# Altium PCB MAGI'sCore.PcbDoc (part 2 of 2)
Units mil, origin at the board's own origin, x right, y up, seen from the top; angles counter-clockwise.
Board outline 6000 x 4000 mil, 2 copper layers (Top Layer, Bottom Layer); 22 components, 33 nets, 128 pads, 28 vias.
Unrouted connection lines stored in the file: 1.
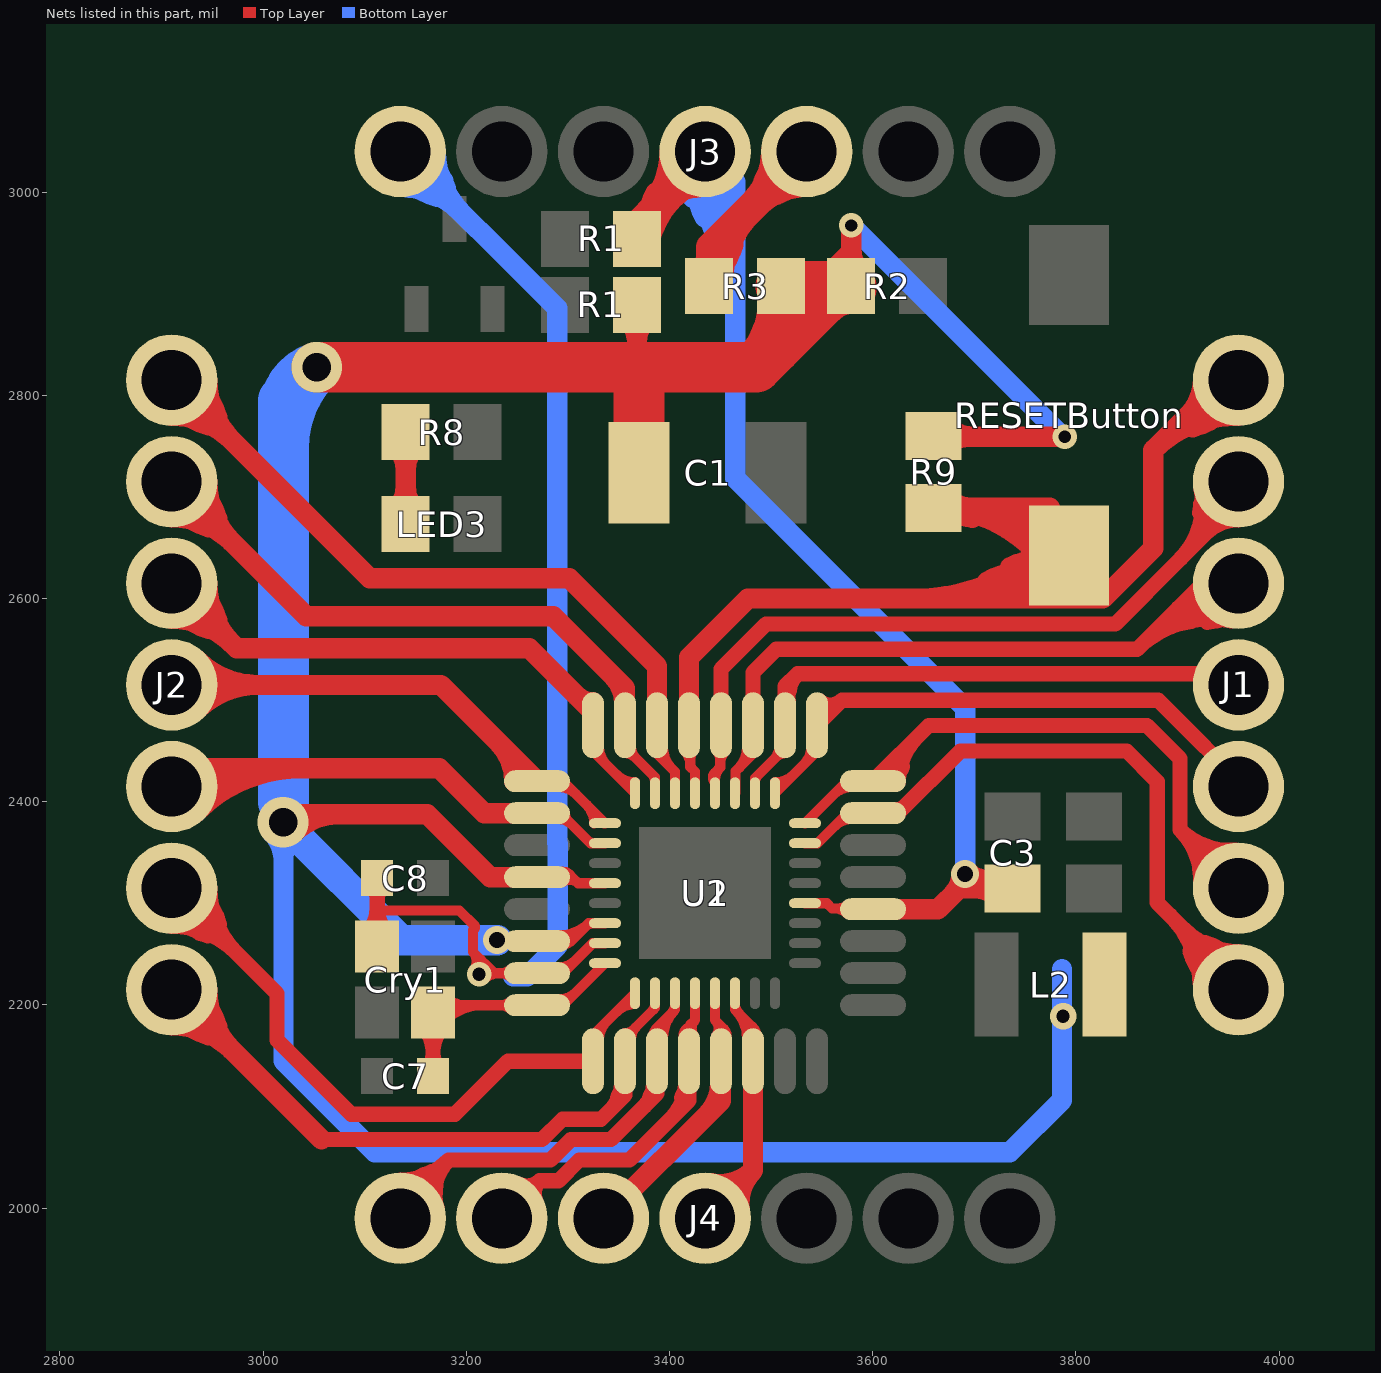
[diagram p2: the nets of this part, all layers, seen from the top]

## Via types
v1: diameter 25.98, hole 12.99, Top Layer to Bottom Layer, tented top, 7 vias
v2: diameter 24, hole 12, Top Layer to Bottom Layer, 6 vias
v3: diameter 27.56, hole 15.75, Top Layer to Bottom Layer, 6 vias
v4: diameter 25.98, hole 12.99, Top Layer to Bottom Layer, 5 vias
v5: diameter 50, hole 28, Top Layer to Bottom Layer, 3 vias
v6: diameter 24, hole 12.99, Top Layer to Bottom Layer, 1 vias

## Nets (pads, with @x,y where several pads share a name; then routed paths per layer and width w, separated by ;. In a path a pad name is that pad's centre, name@x,y a point inside that pad or via, vN(x,y) a via of type N, cw(c..) or ccw(c..) an arc to the next point about the centre after c; other vN are vias at no path point) (continued)
NetC3_2: C3.2 J3.4 R1.2@3368.11,2953.94 U1.20 U2.20 | length 2765.2
  Top Layer w10: U2.20@3533.43,2300.16 3554.84,2300.16 3560,2295 U1.20@3599.61,2295 ; 3562.83,2295 cw(c3562.83,2278.38) 3574.58,2290.13 ccw(c3562.83,2278.38) 3562.83,2295 ; 3566.44,2295 ccw(c3566.44,2306.51) 3574.58,2298.37 cw(c3566.44,2306.51) 3566.44,2295
  Top Layer w20: R1.2@3361.94,2959.47 cw(c3398.67,2949.95) 3379.7,2982.82 ; R1.2@3368.11,2953.94 3368.11,2973.11 J3.4@3435,3040 ; R1.2@3381.27,2961.4 cw(c3429.54,2974.33) 3386.26,2999.32 ; R1.2@3381.3,2954.46 cw(c3463.48,2933.16) J3.4@3421.03,3006.68 ; R1.2@3381.73,2957.87 cw(c3451.4,2957.87) 3402.14,3007.14 ; J3.4@3400,3040 cw(c3315.5,3040) 3375.25,2980.25 cw(c3435,2920.5) J3.4@3435,3005 ; U1.20@3600.35,2294.25 3664.25,2294.25 3684.57,2314.57 ; 3682.78,2312.36 cw(c3703.63,2306.77) v3@3692.83,2325.47 ; v3@3691.92,2325.09 cw(c3697.51,2304.24) 3708.31,2322.93 ; C3.2@3721.3,2308.85 ccw(c3698.86,2298.46) 3705.26,2322.34 ccw(c3711.81,2346.8) C3.2@3726.02,2325.84 ; C3.2@3727.28,2304.25 C3.2@3737.6,2314.57 3684.57,2314.57 ; 3684.57,2314.57 ccw(c3675.92,2323.21) 3687.4,2327.44 cw(c3675.92,2323.21) 3684.57,2314.57 ; 3700.78,2314.57 cw(c3700.78,2281.68) 3724.03,2304.93 ccw(c3700.78,2281.68) 3700.78,2314.57 ; 3700.78,2314.57 ccw(c3700.78,2347.45) 3724.03,2324.2 cw(c3700.78,2347.45) 3700.78,2314.57 ; 3678.98,2308.98 ccw(c3659.22,2328.74) 3687.17,2328.74 cw(c3659.22,2328.74) 3678.98,2308.98 ; v3@3693.62,2331.41 ccw(c3734.29,2372.08) 3734.29,2314.57 cw(c3734.29,2372.08) v3@3693.62,2331.41
  Bottom Layer w20: 3423.01,2994.41 cw(c3455.29,3014.17) J3.4@3431.91,3043.93 ; J3.4@3425.94,3006.19 cw(c3416.88,2972.36) 3447.21,2989.87 ; 3434.74,2975.24 cw(c3469.26,2996.37) J3.4@3444.26,3028.2 ; J3.4@3435,3040 3464.57,3010.43 3464.57,2718.5 3690.94,2492.13 v3(3690.94,2328.74) ; 3446.48,2956.07 cw(c3483.24,2978.57) J3.4@3456.62,3012.47 ; 3455.71,2975.15 cw(c3485.54,2992.37) J3.4@3460.47,3016 ; J3.4@3410.25,3015.25 cw(c3279.12,2884.12) 3464.57,2884.12 ccw(c3279.12,2884.12) J3.4@3410.25,3015.25 ; J3.4@3424.39,3029.39 cw(c3327.41,2932.41) 3464.57,2932.41 ccw(c3327.41,2932.41) J3.4@3424.39,3029.39 ; J3.4@3438.54,3043.54 cw(c3375.69,2980.69) 3464.57,2980.69 ccw(c3375.69,2980.69) J3.4@3438.54,3043.54
NetJ1_1: J1.1 U1.23 U2.23 | length 1249.2
  Top Layer w10: U2.23@3533.43,2359.21 3545.67,2359.21 3575.2,2388.74 U1.23@3600.35,2388.74 ; 3562.77,2376.31 cw(c3578.7,2360.38) 3578.7,2382.91 ccw(c3578.7,2360.38) 3562.77,2376.31
  Top Layer w15: U1.23@3600.35,2388.74 3624.96,2388.74 3686.22,2450 3850,2450 3880,2420 3880,2300.95 3975,2205.95 J1.1@3975,2190 ; 3912.23,2253.32 ccw(c3974.34,2269.96) J1.1@3958.11,2207.74 ; 3927.27,2261.27 cw(c3913.06,2208.21) J1.1@3967.42,2216.07 ; U1.23@3622.01,2392.07 ccw(c3622.01,2407.22) 3632.73,2396.51 cw(c3622.01,2407.22) U1.23@3622.01,2392.07 ; 3891.78,2289.17 cw(c3817.61,2215) 3922.5,2215 ccw(c3817.61,2215) 3891.78,2289.17 ; 3906.13,2274.81 ccw(c3960,2328.68) 3960,2252.5 cw(c3960,2328.68) 3906.13,2274.81 ; 3917.39,2263.56 cw(c3868.82,2215) 3937.5,2215 ccw(c3868.82,2215) 3917.39,2263.56
NetJ1_2: J1.2 U1.24 U2.24 | length 1162.1
  Top Layer w10: U2.24@3533.43,2378.9 3574.76,2420.24 U1.24@3600.35,2420.24 ; 3562.03,2407.5 cw(c3578.7,2390.83) 3578.7,2414.41 ccw(c3578.7,2390.83) 3562.03,2407.5
  Top Layer w15: U1.24@3600.35,2420.24 3655.12,2475 3870,2475 3902.5,2442.5 3902.5,2372.5 ; U1.24@3620.34,2423.12 ccw(c3610.84,2439.57) 3629.2,2434.65 ; J1.2@3960,2315 3902.5,2372.5 ; J1.2@3975,2290 J1.2@3975,2310 ; 3902.5,2372.5 cw(c3853.42,2323.42) 3922.62,2317.95 ccw(c3853.42,2323.42) 3902.5,2372.5 ; 3902.5,2372.5 ccw(c3951.58,2421.58) 3957.05,2352.38 cw(c3951.58,2421.58) 3902.5,2372.5 ; 3925.5,2349.5 cw(c3896.05,2320.05) 3937.57,2316.77 ccw(c3896.05,2320.05) 3925.5,2349.5 ; 3925.5,2349.5 ccw(c3954.95,2378.95) 3958.23,2337.43 cw(c3954.95,2378.95) 3925.5,2349.5 ; U1.24@3610.33,2420.24 cw(c3634.43,2420.24) 3617.39,2437.27 ccw(c3634.43,2420.24) U1.24@3610.33,2420.24 ; U1.24@3625.33,2420.24 cw(c3685.64,2420.24) 3643,2462.88 ccw(c3685.64,2420.24) U1.24@3625.33,2420.24
NetJ1_3: J1.3 U1.25 U2.25 | length 684.3
  Top Layer w10: U2.25@3503.9,2408.43 3545.24,2449.76 U1.25@3545.24,2475.35 ; U2.25@3503.9,2409.17 ccw(c3503.9,2410.98) 3505.17,2409.7 cw(c3503.9,2410.98) U2.25@3503.9,2409.17 ; U2.25@3503.9,2419.17 ccw(c3503.9,2445.12) 3522.25,2426.77 cw(c3503.9,2445.12) U2.25@3503.9,2419.17 ; 3532.51,2437.03 ccw(c3515.84,2453.7) 3539.41,2453.7 cw(c3515.84,2453.7) 3532.51,2437.03
  Top Layer w15: U1.25@3545.24,2475.35 3569.88,2500 ; U1.25@3547.47,2499.47 ccw(c3558.4,2511.48) 3569.88,2500 ; J1.3@3975,2390 3975,2405.95 3880.95,2500 3569.88,2500
NetJ1_4: J1.4 U1.26 U2.26 | length 675.4
  Top Layer w10: U2.26@3484.21,2408.43 3484.21,2423.23 3513.74,2452.76 U1.26@3513.74,2475.35 ; U2.26@3484.13,2419.25 cw(c3493.54,2419.25) 3486.89,2425.91 ccw(c3493.54,2419.25) U2.26@3484.13,2419.25 ; 3503.13,2442.14 ccw(c3491.57,2453.7) 3507.91,2453.7 cw(c3491.57,2453.7) 3503.13,2442.14 ; 3505.4,2444.42 cw(c3513.74,2436.08) 3513.74,2447.87 ccw(c3513.74,2436.08) 3505.4,2444.42
  Top Layer w15: U1.26@3511.6,2499.55 ccw(c3499.35,2514.08) 3518.28,2512.47 ; U1.26@3513.74,2475.35 3513.74,2513.74 3525.91,2525.91 ; J1.4@3930.91,2525.91 3525.91,2525.91 ; 3525.9,2525.9 ccw(c3548.57,2503.23) 3517.01,2497.59 cw(c3548.57,2503.23) 3525.9,2525.9
NetJ1_5: J1.5 U1.27 U2.27 | length 1344.3
  Top Layer w10: U2.27@3464.53,2408.43 3465,2408.9 3465,2430 3482.24,2447.24 U1.27@3482.24,2475.35 ; 3467.73,2432.73 ccw(c3446.76,2453.7) 3476.42,2453.7 cw(c3446.76,2453.7) 3467.73,2432.73
  Top Layer w15: U1.27@3482.24,2475.35 3482.24,2527.24 3505,2550 3860,2550 ; 3893.24,2574.22 ccw(c3886.18,2679.55) J1.5@3965.65,2610.06 ; J1.5@3925,2615 3860,2550 ; 3929.37,2576.64 ccw(c3924.73,2645.84) J1.5@3976.94,2600.19 ; 3860,2550 cw(c3932.8,2477.2) 3952.74,2578.21 ccw(c3932.8,2477.2) 3860,2550 ; 3879.88,2569.88 cw(c3939.36,2510.41) 3955.64,2592.93 ccw(c3939.36,2510.41) 3879.88,2569.88 ; 3899.76,2589.76 cw(c3945.91,2543.61) 3958.55,2607.64 ccw(c3945.91,2543.61) 3899.76,2589.76
  Top Layer w20: J1.5@3925,2615 3950,2615 J1.5@3975,2590
NetJ1_6: J1.6 U1.28 U2.28 | length 1078.8
  Top Layer w10: U2.28@3444.76,2419.24 cw(c3462.88,2421.14) 3450,2434.02 ; U2.28@3444.84,2408.43 3444.84,2428.86 ; U1.28@3450.75,2475.35 3450,2474.61 3450,2434.02 ; 3444.84,2428.86 ccw(c3449.7,2424) 3444.79,2419.2 cw(c3449.7,2424) 3444.84,2428.86 ; 3444.84,2428.86 3450,2434.02 ; U1.28@3446.63,2449.58 cw(c3438.49,2441.44) 3450,2441.44 ccw(c3438.49,2441.44) U1.28@3446.63,2449.58 ; 3450,2437.83 cw(c3466.62,2437.83) 3454.87,2449.58 ccw(c3466.62,2437.83) 3450,2437.83
  Top Layer w15: U1.28@3450.75,2475.35 3450.75,2530.75 3495,2575 3838.78,2575 3902.5,2638.72 3902.5,2638.82 ; 3921.78,2684.19 cw(c3991,2679.87) J1.6@3945.11,2731.87 ; 3922.27,2658.59 ccw(c3881.69,2699.17) J1.6@3937.95,2710.54 ; J1.6@3923.24,2707.57 cw(c3848.8,2692.53) 3902.5,2638.82 ; 3927.88,2664.19 cw(c3960,2632.07) J1.6@3960,2677.5 ; 3933.26,2670.34 ccw(c3921.31,2714.95) J1.6@3967.5,2715.01 ; J1.6@3953.78,2690 3953.68,2690 3902.5,2638.82
  Top Layer w20: J1.6@3953.78,2690 J1.6@3975,2690
NetJ2_3: J2.3 U1.32 U2.32 | length 1073.2
  Top Layer w10: U1.32@3324.76,2475.35 3324.76,2449.76 U2.32@3366.1,2408.43 ; U1.32@3330.59,2453.7 ccw(c3354.16,2453.7) 3337.49,2437.03 cw(c3354.16,2453.7) U1.32@3330.59,2453.7 ; 3347.75,2426.77 ccw(c3366.1,2445.12) 3366.1,2419.17 cw(c3366.1,2445.12) 3347.75,2426.77 ; U2.32@3364.83,2409.7 ccw(c3366.1,2410.98) 3366.1,2409.17 cw(c3366.1,2410.98) U2.32@3364.83,2409.7
  Top Layer w20: J2.3@2905.1,2614 ccw(c2961.07,2625.46) 2946.28,2570.28 ; J2.3@2910,2615 2973.82,2551.18 3261.81,2551.18 3324.76,2488.23 U1.32@3324.76,2475.35 ; J2.3@2911,2619.9 cw(c2899.54,2563.93) 2954.72,2578.72 ; 2969.75,2555.25 cw(c3029.5,2615) 2945,2615 ccw(c3029.5,2615) 2969.75,2555.25 ; 2969.75,2555.25 ccw(c2910,2495.5) 2910,2580 cw(c2910,2495.5) 2969.75,2555.25 ; 3308.37,2504.63 ccw(c3324.76,2521.02) 3324.76,2497.83 cw(c3324.76,2521.02) 3308.37,2504.63
NetJ2_4: J2.4 U1.1 U2.1 | length 923.7
  Top Layer w10: U1.1@3269.65,2420.24 3295.24,2420.24 U2.1@3336.57,2378.9 ; U1.1@3291.3,2414.41 cw(c3291.3,2390.83) 3307.97,2407.5 ccw(c3291.3,2390.83) U1.1@3291.3,2414.41 ; 3318.23,2397.25 cw(c3299.88,2378.9) 3325.83,2378.9 ccw(c3299.88,2378.9) 3318.23,2397.25 ; U2.1@3335.3,2380.17 cw(c3334.02,2378.9) 3335.83,2378.9 ccw(c3334.02,2378.9) U2.1@3335.3,2380.17
  Top Layer w20: J2.4@2910,2515 3174.88,2515 U1.1@3269.65,2420.24 ; 2994.5,2515 cw(c2994.5,2599.5) 2934.75,2539.75 ccw(c2994.5,2599.5) 2994.5,2515 ; 2994.5,2515 ccw(c2994.5,2430.5) 2934.75,2490.25 cw(c2994.5,2430.5) 2994.5,2515 ; 3231.27,2458.61 cw(c3192.89,2420.24) 3247.17,2420.24 ccw(c3192.89,2420.24) 3231.27,2458.61 ; U1.1@3265.41,2424.47 cw(c3261.18,2420.24) 3267.17,2420.24 ccw(c3261.18,2420.24) U1.1@3265.41,2424.47
NetJ2_5: J2.5 U1.2 U2.2 | length 922
  Top Layer w10: U1.2@3269.65,2388.74 3292.76,2388.74 3322.28,2359.21 U2.2@3336.57,2359.21 ; 3319.48,2361.73 ccw(c3325.75,2367.99) U2.2@3325.75,2359.13 ; U1.2@3291.3,2382.91 cw(c3291.3,2366.01) 3303.25,2377.96 ccw(c3291.3,2366.01) U1.2@3291.3,2382.91 ; U1.2@3297.13,2388.74 ccw(c3308.36,2388.74) 3300.42,2380.8 cw(c3308.36,2388.74) U1.2@3297.13,2388.74
  Top Layer w20: J2.5@2910,2415 2928.07,2433.07 3173.23,2433.07 3217.56,2388.74 U1.2@3269.65,2388.74 ; J2.5@2944.22,2407.65 cw(c2970.89,2401.92) 2957.25,2425.55 ; J2.5@2920.61,2404.39 cw(c2989.84,2335.16) 2989.84,2433.07 ccw(c2989.84,2335.16) J2.5@2920.61,2404.39 ; J2.5@2934.75,2390.25 cw(c3038.12,2286.88) 3038.12,2433.07 ccw(c3038.12,2286.88) J2.5@2934.75,2390.25
NetJ2_6: J2.6 U1.9 U2.9 | length 1306.8
  Top Layer w10: U1.9@3324.76,2144.64 3324.76,2170.24 U2.9@3366.1,2211.57 ; U1.9@3330.59,2166.3 cw(c3354.16,2166.3) 3337.5,2182.97 ccw(c3354.16,2166.3) U1.9@3330.59,2166.3 ; 3347.75,2193.23 cw(c3366.1,2174.88) 3366.1,2200.83 ccw(c3366.1,2174.88) 3347.75,2193.23 ; U2.9@3364.83,2210.3 cw(c3366.1,2209.02) 3366.1,2210.83 ccw(c3366.1,2209.02) U2.9@3364.83,2210.3
  Top Layer w15: J2.6@2902.65,2313.5 ccw(c2960.91,2325.43) 2945.52,2267.98 ; J2.6@2910,2315 3013.78,2211.22 3013.78,2165.35 3086.61,2092.52 3188.98,2092.52 3241.1,2144.64 U1.9@3324.76,2144.64 ; J2.6@2911.5,2322.35 cw(c2899.57,2264.09) 2957.02,2279.48 ; 2948.41,2276.59 cw(c2986.82,2315) 2932.5,2315 ccw(c2986.82,2315) 2948.41,2276.59 ; 2948.41,2276.59 ccw(c2910,2238.18) 2910,2292.5 cw(c2910,2238.18) 2948.41,2276.59 ; 2974.02,2250.98 cw(c3038.03,2315) 2947.5,2315 ccw(c3038.03,2315) 2974.02,2250.98 ; 2974.02,2250.98 ccw(c2910,2186.97) 2910,2277.5 cw(c2910,2186.97) 2974.02,2250.98
NetJ2_7: J2.7 U1.10 U2.10 | length 1153.1
  Top Layer w10: U1.10@3356.26,2144.64 3356.26,2167.47 3385.79,2197 U2.10@3385.79,2211.57 ; 3383.27,2194.48 ccw(c3377.01,2200.75) U2.10@3385.87,2200.75 ; U1.10@3356.26,2172.13 ccw(c3356.26,2183.36) 3364.2,2175.42 cw(c3356.26,2183.36) U1.10@3356.26,2172.13 ; U1.10@3362.09,2166.3 cw(c3378.99,2166.3) 3367.04,2178.25 ccw(c3378.99,2166.3) U1.10@3362.09,2166.3
  Top Layer w15: 3057.5,2067.5 3274.61,2067.5 3294.61,2087.5 3332.5,2087.5 3356.26,2111.26 U1.10@3356.26,2144.64 ; 3349.07,2108.57 cw(c3367.42,2103.65) U1.10@3357.92,2120.11 ; 3342.29,2097.29 ccw(c3316.58,2122.99) 3352.93,2122.99 cw(c3316.58,2122.99) 3342.29,2097.29
  Top Layer w20: J2.7@2905.1,2214 ccw(c2961.07,2225.46) 2946.28,2170.28 ; J2.7@2910,2215 3057.5,2067.5 ; J2.7@2911,2219.9 cw(c2899.54,2163.93) 2954.72,2178.72 ; 2969.75,2155.25 cw(c3029.5,2215) 2945,2215 ccw(c3029.5,2215) 2969.75,2155.25 ; 2969.75,2155.25 ccw(c2910,2095.5) 2910,2180 cw(c2910,2095.5) 2969.75,2155.25
NetJ4_1: J4.1 U1.11 U2.11 | length 819.3
  Top Layer w10: U1.11@3383.58,2166.26 cw(c3400.85,2166.43) 3388.64,2178.64 ; U1.11@3384.32,2171.01 ccw(c3379.41,2177.75) 3387.76,2177.75 ; U1.11@3387.76,2144.64 3387.76,2177.76 ; U1.11@3391.19,2171.01 cw(c3396.1,2177.75) 3387.76,2177.75 ; U1.11@3393.58,2166.36 cw(c3434.18,2166.76) 3405.47,2195.47 ; U2.11@3405.47,2211.57 3405.47,2195.47 ; 3387.76,2177.76 3405.47,2195.47 ; 3401.88,2191.87 ccw(c3393,2200.75) 3405.55,2200.75 cw(c3393,2200.75) 3401.88,2191.87
  Top Layer w15: J4.1@3127.54,1990.75 cw(c3179.28,1985.53) 3165.82,2035.76 ; J4.1@3135,2000 3182.5,2047.5 ; J4.1@3135,2027.5 ccw(c3135,2093.89) 3181.95,2046.95 ; J4.1@3151.44,1974.64 ccw(c3100.76,2021.98) 3170.07,2024.35 ; J4.1@3156.52,1996.56 cw(c3188.38,2006.28) 3164.83,2029.83 ; J4.1@3170.87,2000.94 cw(c3215.46,2014.53) 3182.5,2047.5 ; 3380.57,2108.57 cw(c3398.92,2103.65) U1.11@3389.42,2120.11 ; U1.11@3387.76,2144.64 3387.76,2112.76 3342.5,2067.5 3302.9,2067.5 3282.9,2047.5 3182.5,2047.5 ; 3374.84,2099.84 ccw(c3351.69,2122.99) 3384.43,2122.99 cw(c3351.69,2122.99) 3374.84,2099.84
  Top Layer w20: J4.1@3135,1990 J4.1@3135,2000
NetJ4_2: J4.2 U1.12 U2.12 | length 537.7
  Top Layer w10: U1.12@3420,2145.39 3420,2180 ; U2.12@3425.16,2211.57 3425.16,2185.16 ; 3420,2180 cw(c3408.27,2180) 3415.61,2170.84 ccw(c3408.27,2180) 3420,2180 ; 3420,2180 3425.16,2185.16 ; 3425.16,2185.16 ccw(c3433.57,2176.74) 3423.96,2169.73 cw(c3433.57,2176.74) 3425.16,2185.16 ; U1.12@3415.88,2163.84 cw(c3424.01,2169.77) 3416.89,2176.89 ccw(c3424.01,2169.77) U1.12@3415.88,2163.84 ; 3420,2178.56 ccw(c3431.51,2178.56) 3423.37,2170.42 cw(c3431.51,2178.56) 3420,2178.56
  Top Layer w15: J4.2@3235,1990 3271.93,2026.93 ; J4.2@3251.65,2023.6 ccw(c3259.47,2039.38) 3271.93,2026.93 ; J4.2@3268.6,2006.65 cw(c3284.38,2014.47) 3271.93,2026.93 ; 3401.61,2088.43 ccw(c3367.05,2122.99) U1.12@3415.93,2122.99 ; 3412.06,2108.57 cw(c3430.42,2103.65) U1.12@3420.92,2120.11 ; U1.12@3419.25,2144.64 3419.25,2106.07 3360.68,2047.5 3311.18,2047.5 3290.61,2026.93 3271.93,2026.93
NetLED3_1: LED3.1 R8.1 | length 297.2
  Top Layer w20: LED3.1@3140.35,2673.23 R8.1@3140.35,2763.78 ; 3140.35,2710.05 cw(c3107.47,2710.05) 3130.72,2686.8 ccw(c3107.47,2710.05) 3140.35,2710.05 ; 3140.35,2710.05 ccw(c3173.24,2710.05) 3149.99,2686.8 cw(c3173.24,2710.05) 3140.35,2710.05 ; 3140.35,2726.96 cw(c3173.24,2726.96) 3149.99,2750.21 ccw(c3173.24,2726.96) 3140.35,2726.96 ; 3140.35,2726.96 ccw(c3107.47,2726.96) 3130.72,2750.21 cw(c3107.47,2726.96) 3140.35,2726.96
OC1A: J4.3 U1.13 U2.13 | length 407.3
  Top Layer w10: U2.13@3444.84,2211.57 3444.84,2185.16 ; U1.13@3450.75,2144.64 3450.75,2179.25 ; 3444.84,2185.16 cw(c3436.43,2176.74) 3446.04,2169.73 ccw(c3436.43,2176.74) 3444.84,2185.16 ; 3444.84,2185.16 3450.75,2179.25 ; 3450.75,2179.25 cw(c3439.27,2179.25) 3446.88,2170.66 ccw(c3439.27,2179.25) 3450.75,2179.25 ; 3450.75,2179.25 ccw(c3462.23,2179.25) 3454.61,2170.66 cw(c3462.23,2179.25) 3450.75,2179.25 ; 3453.11,2176.89 cw(c3445.99,2169.77) 3454.12,2163.84 ccw(c3445.99,2169.77) 3453.11,2176.89
  Top Layer w20: J4.3@3335,1990 3450.75,2105.75 U1.13@3450.75,2144.64 ; 3437.14,2092.14 ccw(c3406.3,2122.99) U1.13@3449.92,2122.99
OC1B: J4.4 U1.14 U2.14 | length 508.5
  Top Layer w10: U2.14@3464.53,2211.57 3464.53,2195.47 ; U1.14@3476.42,2166.36 ccw(c3435.82,2166.76) 3464.53,2195.47 ; U1.14@3478.81,2171.01 ccw(c3473.9,2177.75) 3482.24,2177.75 ; 3481.36,2178.64 cw(c3469.15,2166.43) U1.14@3486.42,2166.26 ; U1.14@3482.24,2144.64 3482.24,2177.76 ; U1.14@3485.68,2171.01 cw(c3490.59,2177.75) 3482.24,2177.75 ; 3464.53,2195.47 3482.24,2177.76 ; U2.14@3464.45,2200.75 ccw(c3477,2200.75) 3468.12,2191.87 cw(c3477,2200.75) U2.14@3464.45,2200.75
  Top Layer w20: J4.4@3435,1990 3482.24,2037.24 ; U1.14@3482.24,2144.64 3482.24,2037.24 ; 3482.24,2037.24 cw(c3449.53,2069.96) 3441.26,2024.44 ccw(c3449.53,2069.96) 3482.24,2037.24 ; 3482.24,2037.24 ccw(c3514.96,2004.53) 3469.44,1996.26 cw(c3514.96,2004.53) 3482.24,2037.24
PB6: C8.1 Cry1.1 J3.7 U1.7 U2.7 | length 2059.9
  Top Layer w10: 3112.26,2295.28 3114.53,2293.01 3193.06,2293.01 3208.66,2277.41 3208.66,2275.76 3206.54,2273.63 3206.54,2252.13 ; U2.7@3336.57,2260.79 3324.33,2260.79 3294.8,2231.26 U1.7@3269.65,2231.26 3227.4,2231.26 ; 3206.54,2252.13 cw(c3197.5,2243.09) 3207.25,2234.84 ccw(c3197.5,2243.09) 3206.54,2252.13 ; 3206.54,2252.13 3227.4,2231.26 ; v6@3217.55,2235.26 ccw(c3227.22,2244.94) 3227.22,2231.26 ; v6@3217.55,2235.26 ccw(c3227.22,2244.94) 3227.22,2231.26 ; v6@3217.55,2235.26 ccw(c3227.22,2244.94) 3227.22,2231.26 ; v6@3217.55,2235.26 ccw(c3227.22,2244.94) 3227.22,2231.26 ; 3227.4,2231.26 ccw(c3227.4,2220.49) 3218.43,2226.45 cw(c3227.4,2220.49) 3227.4,2231.26 ; 3233.93,2231.26 cw(c3233.93,2217.19) 3243.87,2227.14 ccw(c3233.93,2217.19) 3233.93,2231.26 ; 3233.93,2231.26 ccw(c3233.93,2245.33) 3243.87,2235.38 cw(c3233.93,2245.33) 3233.93,2231.26 ; 3214.22,2244.44 cw(c3205.83,2236.05) 3214.89,2228.38 ccw(c3205.83,2236.05) 3214.22,2244.44 ; v6@3217.55,2225.37 cw(c3231.78,2211.14) 3231.78,2231.26 ccw(c3231.78,2211.14) v6@3217.55,2225.37 ; U1.7@3291.3,2237.09 ccw(c3291.3,2259.61) 3307.23,2243.68 cw(c3291.3,2259.61) U1.7@3291.3,2237.09
  Top Layer w15: C8.1@3112.2,2324.92 3112.26,2324.86 3112.26,2295.28 Cry1.1@3112.26,2257.42 ; 3112.26,2295.27 cw(c3078.7,2295.27) 3102.31,2271.42 ccw(c3078.7,2295.27) 3112.26,2295.27 ; 3112.26,2295.27 ccw(c3145.82,2295.27) 3122.22,2271.42 cw(c3145.82,2295.27) 3112.26,2295.27 ; C8.1@3106.37,2317.12 cw(c3092.15,2302.9) 3112.26,2302.9 ccw(c3092.15,2302.9) C8.1@3106.37,2317.12 ; 3112.26,2303.18 cw(c3131.97,2303.18) 3118.04,2317.12 ccw(c3131.97,2303.18) 3112.26,2303.18
  Bottom Layer w20: J3.7@3130.1,3039 ccw(c3186.07,3050.46) 3171.28,2995.28 ; J3.7@3135,3040 3289.37,2885.63 3289.37,2359.49 3290,2358.86 3290,2258.5 3259.84,2228.35 3246.06,2228.35 ; J3.7@3136,3044.9 cw(c3124.54,2988.93) 3179.72,3003.72 ; 3194.75,2980.25 cw(c3254.5,3040) 3170,3040 ccw(c3254.5,3040) 3194.75,2980.25 ; 3194.75,2980.25 ccw(c3135,2920.5) 3135,3005 cw(c3135,2920.5) 3194.75,2980.25
  other v6: 3212.6,2230.32
PB7: C7.2 Cry1.3 U1.8 U2.8 | length 672.9
  Top Layer w10: Cry1.3@3167.26,2192.42 3174.61,2199.76 U1.8@3269.65,2199.76 3295.24,2199.76 U2.8@3336.57,2241.1 ; 3233.93,2199.76 cw(c3233.93,2185.7) 3243.87,2195.64 ccw(c3233.93,2185.7) 3233.93,2199.76 ; 3233.93,2199.76 ccw(c3233.93,2213.83) 3243.87,2203.88 cw(c3233.93,2213.83) 3233.93,2199.76 ; Cry1.3@3171.97,2191.65 cw(c3191.55,2172.08) 3191.55,2199.76 ccw(c3191.55,2172.08) Cry1.3@3171.97,2191.65 ; Cry1.3@3179.04,2184.58 cw(c3215.69,2147.93) 3215.69,2199.76 ccw(c3215.69,2147.93) Cry1.3@3179.04,2184.58 ; Cry1.3@3179.04,2208.13 ccw(c3199.25,2228.34) 3199.25,2199.76 cw(c3199.25,2228.34) Cry1.3@3179.04,2208.13 ; U1.8@3291.3,2205.59 ccw(c3291.3,2229.16) 3307.97,2212.49 cw(c3291.3,2229.16) U1.8@3291.3,2205.59
  Top Layer w15: Cry1.3@3167.26,2192.42 3167.26,2129.98 C7.2@3167.32,2129.92 ; 3167.26,2154.31 cw(c3201.43,2154.31) 3177.27,2178.48 ccw(c3201.43,2154.31) 3167.26,2154.31 ; 3167.26,2154.31 ccw(c3133.09,2154.31) 3157.26,2178.48 cw(c3133.09,2154.31) 3167.26,2154.31 ; C7.2@3161.49,2137.72 ccw(c3147.55,2151.66) 3167.26,2151.66 cw(c3147.55,2151.66) C7.2@3161.49,2137.72 ; 3167.26,2151.94 ccw(c3187.38,2151.94) 3173.16,2137.72 cw(c3187.38,2151.94) 3167.26,2151.94
RST: J1.7 R9.1 RESETButton.1 U1.29 U2.29 | length 2821.5
  Top Layer w10: U1.29@3419.25,2475.35 3420.47,2474.13 3420.47,2434.53 3425.16,2429.84 U2.29@3425.16,2408.43 ; U1.29@3415.13,2449.58 cw(c3402.24,2436.69) 3420.47,2436.69 ccw(c3402.24,2436.69) U1.29@3415.13,2449.58 ; 3420.47,2442.58 cw(c3430.37,2442.58) 3423.37,2449.58 ccw(c3430.37,2442.58) 3420.47,2442.58
  Top Layer w20: U1.29@3419.25,2475.35 3419.25,2542.26 3476.99,2600 3826.38,2600 3875.98,2649.61 3875.98,2745.98 ; R9.1@3670.79,2677.57 cw(c3685.49,2652.1) 3693.11,2680.51 ; R9.1@3673.61,2679.74 cw(c3696.86,2656.48) 3696.86,2689.37 cw(c3696.86,2722.26) R9.1@3673.61,2699 ; R9.1@3675.77,2696.18 ccw(c3707.26,2714.36) 3697.85,2679.24 ; 3700.27,2689.37 cw(c3700.27,2582.05) RESETButton.1@3785.84,2646.82 ; 3712.69,2616.73 cw(c3739.35,2573.41) RESETButton.1@3773.56,2611.06 ; 3730.87,2607.2 cw(c3754.89,2565.61) RESETButton.1@3778.73,2607.3 ; 3735.35,2630.67 cw(c3757.98,2593.91) RESETButton.1@3787.01,2625.86 ; 3740.49,2689.37 cw(c3740.49,2612.5) RESETButton.1@3801.78,2658.9 ; 3746.3,2616.11 ccw(c3726.3,2650.75) RESETButton.1@3764.94,2640.4 ; RESETButton.1@3769.89,2634.75 ccw(c3660.05,2551.6) R9.1@3660.04,2689.37 RESETButton.1@3774.41,2689.37 ; 3915.1,2768.68 ccw(c3897.38,2838.26) J1.7@3964.69,2813.26 ; 3917.31,2786.3 cw(c3961.25,2774.53) J1.7@3959.85,2820 ; J1.7@3975,2790 3920,2790 ; 3875.99,2745.99 cw(c3958.13,2663.85) 3959.57,2780 ccw(c3958.13,2663.85) 3875.99,2745.99 ; 3875.98,2745.98 3920,2790 ; 3920,2790 cw(c3927.75,2782.25) 3935.44,2790.06 ccw(c3927.75,2782.25) 3920,2790 ; 3920,2790 ccw(c3905.51,2804.49) 3925.63,2808.37 cw(c3905.51,2804.49) 3920,2790 ; 3643.23,2600 ccw(c3643.23,2782.87) 3772.54,2653.56 cw(c3643.23,2782.87) 3643.23,2600 ; 3691.51,2600 ccw(c3691.51,2734.59) 3786.68,2639.42 cw(c3691.51,2734.59) 3691.51,2600 ; 3739.8,2600 ccw(c3739.8,2686.31) 3800.82,2625.28 cw(c3739.8,2686.31) 3739.8,2600 ; 3909.54,2779.54 cw(c3958.95,2730.13) 3959.81,2800 ccw(c3958.95,2730.13) 3909.54,2779.54 ; 3910.86,2780.86 ccw(c3876.72,2815) 3925,2815 cw(c3876.72,2815) 3910.86,2780.86
RXD: J2.1 U1.30 U2.30 | length 1165.3
  Top Layer w10: U1.30@3387.76,2475.35 3387.76,2447.24 3405.47,2429.53 U2.30@3405.47,2408.43 ; U1.30@3393.58,2453.7 ccw(c3423.24,2453.7) 3402.27,2432.73 cw(c3423.24,2453.7) U1.30@3393.58,2453.7
  Top Layer w20: J2.1@2905.1,2814 ccw(c2961.07,2825.46) 2946.28,2770.28 ; J2.1@2910,2815 3104.92,2620.08 3301.18,2620.08 3387.76,2533.5 U1.30@3387.76,2475.35 ; J2.1@2911,2819.9 cw(c2899.54,2763.93) 2954.72,2778.72 ; 2969.75,2755.25 cw(c3029.5,2815) 2945,2815 ccw(c3029.5,2815) 2969.75,2755.25 ; 2969.75,2755.25 ccw(c2910,2695.5) 2910,2780 cw(c2910,2695.5) 2969.75,2755.25
TXD: J2.2 U1.31 U2.31 | length 1160.1
  Top Layer w10: U1.31@3356.26,2475.35 3356.26,2453.74 3385.79,2424.21 U2.31@3385.79,2408.43 ; U1.31@3356.26,2447.87 cw(c3356.26,2433.71) 3366.27,2443.72 ccw(c3356.26,2433.71) U1.31@3356.26,2447.87 ; U1.31@3362.09,2453.7 ccw(c3376.06,2453.7) 3366.18,2443.82 cw(c3376.06,2453.7) U1.31@3362.09,2453.7 ; 3382.41,2427.58 cw(c3374.08,2419.25) 3385.87,2419.25 ccw(c3374.08,2419.25) 3382.41,2427.58
  Top Layer w20: J2.2@2905.1,2714 ccw(c2961.07,2725.46) 2946.28,2670.28 ; J2.2@2910,2715 3042.32,2582.68 3285.43,2582.68 3356.26,2511.85 U1.31@3356.26,2475.35 ; J2.2@2911,2719.9 cw(c2899.54,2663.93) 2954.72,2678.72 ; 2969.75,2655.25 cw(c3029.5,2715) 2945,2715 ccw(c3029.5,2715) 2969.75,2655.25 ; 2969.75,2655.25 ccw(c2910,2595.5) 2910,2680 cw(c2910,2595.5) 2969.75,2655.25 ; 3344.35,2523.76 cw(c3317.6,2497.01) 3355.43,2497.01 ccw(c3317.6,2497.01) 3344.35,2523.76
VCC: C1.2 L2.2 R1.2@3367.91,2889.17 R2.2 R3.1 R9.2 U1.4 U1.6 U2.4 U2.6 | length 4705.7
  Top Layer w10: U1.6@3269.65,2262.76 3302.76,2262.76 ; U1.4@3269.65,2325.75 3270.39,2325 3305,2325 ; U2.6@3336.57,2280.47 3320.47,2280.47 ; U2.4@3336.57,2319.84 3310.16,2319.84 ; 3302.76,2262.76 cw(c3302.76,2271.1) 3296.01,2266.19 ccw(c3302.76,2271.1) 3302.76,2262.76 ; 3302.76,2262.76 ccw(c3302.76,2254.41) 3296.01,2259.32 cw(c3302.76,2254.41) 3302.76,2262.76 ; 3302.76,2262.76 3320.47,2280.47 ; 3305,2325 cw(c3305,2336.73) 3295.85,2329.39 ccw(c3305,2336.73) 3305,2325 ; 3305,2325 3310.16,2319.84 ; 3310.16,2319.84 ccw(c3301.75,2311.43) 3294.73,2321.04 cw(c3301.75,2311.43) 3310.16,2319.84 ; 3320.47,2280.47 cw(c3291.76,2309.18) 3291.36,2268.58 ccw(c3291.76,2309.18) 3320.47,2280.47 ; U1.4@3288.84,2329.12 cw(c3294.77,2320.98) 3301.89,2328.1 ccw(c3294.77,2320.98) U1.4@3288.84,2329.12 ; U1.6@3291.26,2258.58 ccw(c3291.43,2275.85) 3303.64,2263.64 cw(c3291.43,2275.85) U1.6@3291.26,2258.58 ; U1.4@3295.42,2321.63 cw(c3303.56,2313.49) 3303.56,2325 ccw(c3303.56,2313.49) U1.4@3295.42,2321.63 ; 3316.88,2276.88 cw(c3325.75,2268.01) 3325.75,2280.55 ccw(c3325.75,2268.01) 3316.88,2276.88
  Top Layer w20: v5@3027.56,2387.8 3161.42,2387.8 3223.47,2325.75 U1.4@3269.65,2325.75 ; v5@3030.29,2369.31 cw(c3074.91,2324.7) 3074.91,2387.8 ; R1.2@3358.28,2875.6 cw(c3335.03,2852.35) 3367.91,2852.35 cw(c3400.8,2852.35) R1.2@3377.55,2875.6 ; 3367.91,2827.76 R1.2@3367.91,2889.17 ; 3545.08,2907.48 3578.94,2941.34 ; v2(3578.94,2967.32) 3578.94,2941.34 ; R9.2@3660.04,2760.24 3661.02,2759.25 v2(3788.98,2759.25) ; 3578.94,2941.34 cw(c3553.26,2941.34) 3569.91,2921.79 ccw(c3553.26,2941.34) 3578.94,2941.34 ; 3578.94,2941.34 ccw(c3605.37,2941.34) 3587.8,2921.59 cw(c3605.37,2941.34) 3578.94,2941.34 ; R2.2@3569.11,2921.05 ccw(c3545.38,2944.78) 3578.94,2944.78 cw(c3545.38,2944.78) R2.2@3569.11,2921.05 ; 3578.94,2943.83 ccw(c3611.15,2943.83) 3588.37,2921.05 cw(c3611.15,2943.83) 3578.94,2943.83 ; R9.2@3673.61,2750.6 cw(c3694.49,2729.73) 3694.49,2759.25 ccw(c3694.49,2729.73) R9.2@3673.61,2750.6 ; R9.2@3673.61,2769.87 ccw(c3699.24,2795.5) 3699.24,2759.25 cw(c3699.24,2795.5) R9.2@3673.61,2769.87
  Top Layer w50: v5(3052.76,2827.76) 3367.91,2827.76 ; C1.2@3369.92,2724.02 3369.92,2822.6 3367.91,2824.61 3367.91,2827.76 ; 3502.48,2845 ccw(c3467.14,2880.34) R3.1@3511.05,2904.2 ; R3.1@3509.84,2907.48 3545.08,2907.48 R2.2@3578.74,2907.48 ; R3.1@3511.21,2903.72 cw(c3420.78,2892.22) 3485.24,2827.76 ; R2.2@3557.09,2899.61 3485.24,2827.76 ; 3367.91,2827.76 3485.24,2827.76 ; 3550.85,2893.37 cw(c3578.74,2865.48) R2.2@3578.74,2904.92 ; 3550.85,2893.37 cw(c3578.74,2865.48) R2.2@3578.74,2904.92 ; 3550.85,2893.37 cw(c3578.74,2865.48) R2.2@3578.74,2904.92 ; 3550.85,2893.37 cw(c3578.74,2865.48) R2.2@3578.74,2904.92
  Bottom Layer w20: v5@3009.08,2369.31 cw(c2982.71,2342.95) 3020,2342.95 ; 3020,2344.47 cw(c3055.14,2344.47) v5@3030.29,2369.31 ; v5@3020,2379.61 3020,2145 3110,2055 3735,2055 3786.3,2106.3 3786.3,2235.35 ; v5@3020,2379.92 v5@3020,2400 ; v2(3578.94,2967.32) 3787.01,2759.25 v2(3788.98,2759.25)
  Bottom Layer w30: v5@3020,2379.61 3135.83,2263.78 v3(3230.32,2263.78)
  Bottom Layer w50: v5@3020,2400 3020,2795 v5(3052.76,2827.76) ; 3020,2748.68 cw(c3131.84,2748.68) v5(3052.76,2827.76) ; 3020,2781.43 cw(c3069.13,2781.43) v5(3052.76,2827.76)
  other v4: 3787.4,2188.98
  other v5: 3019.68,2379.92
VIN: J3.3 R3.2 | length 761.3
  Top Layer w30: R3.2@3434.67,2918.88 ccw(c3410.04,2961.54) 3457.61,2948.79 ; R3.2@3438.98,2916.08 R3.2@3438.98,2907.48 3440.94,2909.45 3440.94,2945.61 3535,3039.66 J3.3@3535,3040 ; 3494.82,3002 cw(c3545.79,2988.35) J3.3@3535,3040 ; 3497.4,2999.93 ccw(c3483.92,3050.25) J3.3@3535,3040 ; R3.2@3432.88,2917.51 ccw(c3413.41,2936.99) 3440.94,2936.99 cw(c3413.41,2936.99) R3.2@3432.88,2917.51 ; R3.2@3447.6,2911.42 cw(c3546.2,2911.42) 3476.48,2981.14 ccw(c3546.2,2911.42) R3.2@3447.6,2911.42 ; 3483.55,2988.21 ccw(c3431.76,3040) 3505,3040 cw(c3431.76,3040) 3483.55,2988.21 ; 3484.36,2989.03 cw(c3535,2938.39) 3535,3010 ccw(c3535,2938.39) 3484.36,2989.03

## Polygon pours and split planes (outlines as drawn)
GND on Bottom Layer "Keep-Out Layer-No Net" (solid, pour order 8): 2824.76,3124.34 2824.76,1904.34 4044.76,1904.34 4044.76,3124.34
GND on Top Layer "Bottom Layer-No Net" (solid, pour order 3): 2828.89,3127.06 2828.89,1898.72 4055.26,1898.72 4055.26,3127.06

## Keep-outs
Keep-Out Layer:
  lines w10: 2830,2100 2830,2805 2830,2945 ; 2830,2110 ccw(c3030,2110) 3030,1910 ; 2830,2920 cw(c3030,2920) 3030,3120 ; 3010,3120 3860,3120 ; 3025,1910 3850,1910 ; 3840,1910 ccw(c3840,2110) 4040,2110 ; 3840,3120 cw(c3840,2920) 4040,2920 ; 4040,2090 4040,2945

## Other copper
Top Layer:
  rectangle net GND: 3524.21,2672.64 3569.49,2794.88
  rectangle net VCC: 3771.65,2165.35 3779.53,2246.06
  rectangle net VCC: 3779.53,2165.35 3850.39,2253.94
  text "MAGI" at 2907.76,2974.37 h39.37
  text "Core" at 2903.54,2916.54 h39.37
Bottom Layer:
  rectangle net PB6: 3210.47,2218.35 3230.47,2238.35
  rectangle net PB6: 3236.22,2218.35 3255.47,2238.35
  rectangle net GND: 3351.66,2224.21 3519.09,2389.19
  rectangle net GND: 3523.82,2682.32 3591.73,2783.86
  rectangle net GND: 3548.27,2657.87 3599.02,2686.61
  text "MAGI" at 3950,2000 h31.5

## Silkscreen, mask and mechanical layers (free items; w line width, h text height)
Top Overlay:
  circle w13: c3847.93,2930 r7.07
  lines w11.81: 3482.24,2262.76 ccw(c3482.24,2262.8) 3482.28,2262.8 cw(c3482.24,2262.8) 3482.24,2262.76
Bottom Overlay:
  text "AREF" at 3480.75,2932.05 h31.5
  text "5V" at 3560.75,2932.05 h31.5
  text "3V3" at 3670.75,2932.05 h31.5
  text "GND" at 3775.75,2932.05 h31.5
  text "D0" at 3045.16,2792.28 h39.37
  text "RST" at 3895.16,2792.28 h39.37
  text "D1" at 3045.16,2692.28 h39.37
  text "A5" at 3895.16,2691.45 h39.37
  text "D2" at 3045.16,2592.28 h39.37
  text "A4" at 3895.16,2590.62 h39.37
  text "D3" at 3045.16,2492.28 h39.37
  text "A3" at 3895.16,2489.78 h39.37
  text "D4" at 3045.16,2392.28 h39.37
  text "A2" at 3895.16,2388.95 h39.37
  text "D5" at 3045.16,2292.28 h39.37
  text "A1" at 3895.16,2288.12 h39.37
  text "D6" at 3045.16,2192.28 h39.37
  text "A0" at 3895.16,2187.28 h39.37
  text "D7" at 3170.16,2057.28 h39.37
  text "D8" at 3269.16,2057.28 h39.37
  text "D9" at 3368.16,2057.28 h39.37
  text "D10" at 3478.15,2055.16 h31.5
  text "D11" at 3566.66,2055.16 h31.5
  text "D12" at 3676.16,2055.16 h31.5
  text "D13" at 3775.16,2055.16 h31.5
Top Solder:
  lines w10: 3290,2294.25 3304.25,2294.25 3310.16,2300.16 3336.57,2300.16 ; 3294.8,2231.26 3324.33,2260.79 ; 3295.24,2199.76 3330,2234.53 ; 3295.24,2420.24 3336.57,2378.9 ; 3297.2,2385 3322.99,2359.21 3336.57,2359.21 ; 3302.76,2262.76 3320.47,2280.47 3330,2280.47 ; 3302.76,2357.24 3320.47,2339.53 3336.57,2339.53 ; 3305,2325 3310.16,2319.84 3336.57,2319.84 ; 3324.76,2170.24 3366.1,2211.57 ; 3324.76,2449.76 3366.1,2408.43 ; 3356.26,2167.47 3385.79,2197 ; 3360,2450 3385.79,2424.21 ; 3369.84,2300.16 3370,2300 ; 3387.76,2177.76 3405.47,2195.47 3405.47,2211.57 ; 3387.76,2447.24 3405.47,2429.53 3405.47,2425 ; 3420,2180 3425.16,2185.16 3425.16,2205 ; 3420.47,2445 3420.47,2434.53 3425.16,2429.84 ; 3444.84,2420 3444.84,2428.86 3450,2434.02 3450,2450 ; 3445,2200 3445,2185 3450.75,2179.25 3450.75,2172.95 ; 3464.53,2211.57 3464.53,2195.47 3485,2175 3485,2172.2 ; 3465,2419.45 3465,2430 3482.24,2447.24 ; 3484.21,2197 3505,2176.21 ; 3484.21,2423.23 3513.74,2452.76 ; 3503.9,2206.1 3506.1,2206.1 3540,2172.2 ; 3503.9,2408.43 3545.24,2449.76 ; 3533.43,2378.9 3569.53,2415 3572.8,2415 ; 3539.17,2359.65 3546.06,2359.65 3571.26,2384.84 ; 3540,2300.16 3554.84,2300.16 3560,2295 3570,2295 ; 3545,2320 3555,2320 3560,2325 3585,2325 ; 3546.46,2260 3575.2,2231.26 ; 3547.24,2362.2 3548.62,2362.2 ; 3549.53,2339.53 3567.24,2357.24 ; 3550,2280 3567.24,2262.76 3600.35,2262.76
  lines w12: 3506.1,2206.1 3545.24,2166.97 3545.24,2164.76 ; 3533.43,2241.1 3574.76,2199.76 3585,2199.76
  lines w50: 3535,3031.09 3535,3040
Bottom Solder:
  rectangle: 3210.47,2218.35 3230.47,2238.35
  rectangle: 3236.22,2218.35 3255.47,2238.35
Mechanical 1:
  lines w10: 2830,2100 2830,2805 2830,2945 ; 2830,2110 ccw(c3030,2110) 3030,1910 ; 2830,2920 cw(c3030,2920) 3030,3120 ; 3010,1910 3850,1910 ; 3010,3120 3860,3120 ; 3840,1910 ccw(c3840,2110) 4040,2110 ; 3840,3120 cw(c3840,2920) 4040,2920 ; 4040,2090 4040,2945